# EAGLE board Comunication Board (EAGLE 9.5.0)
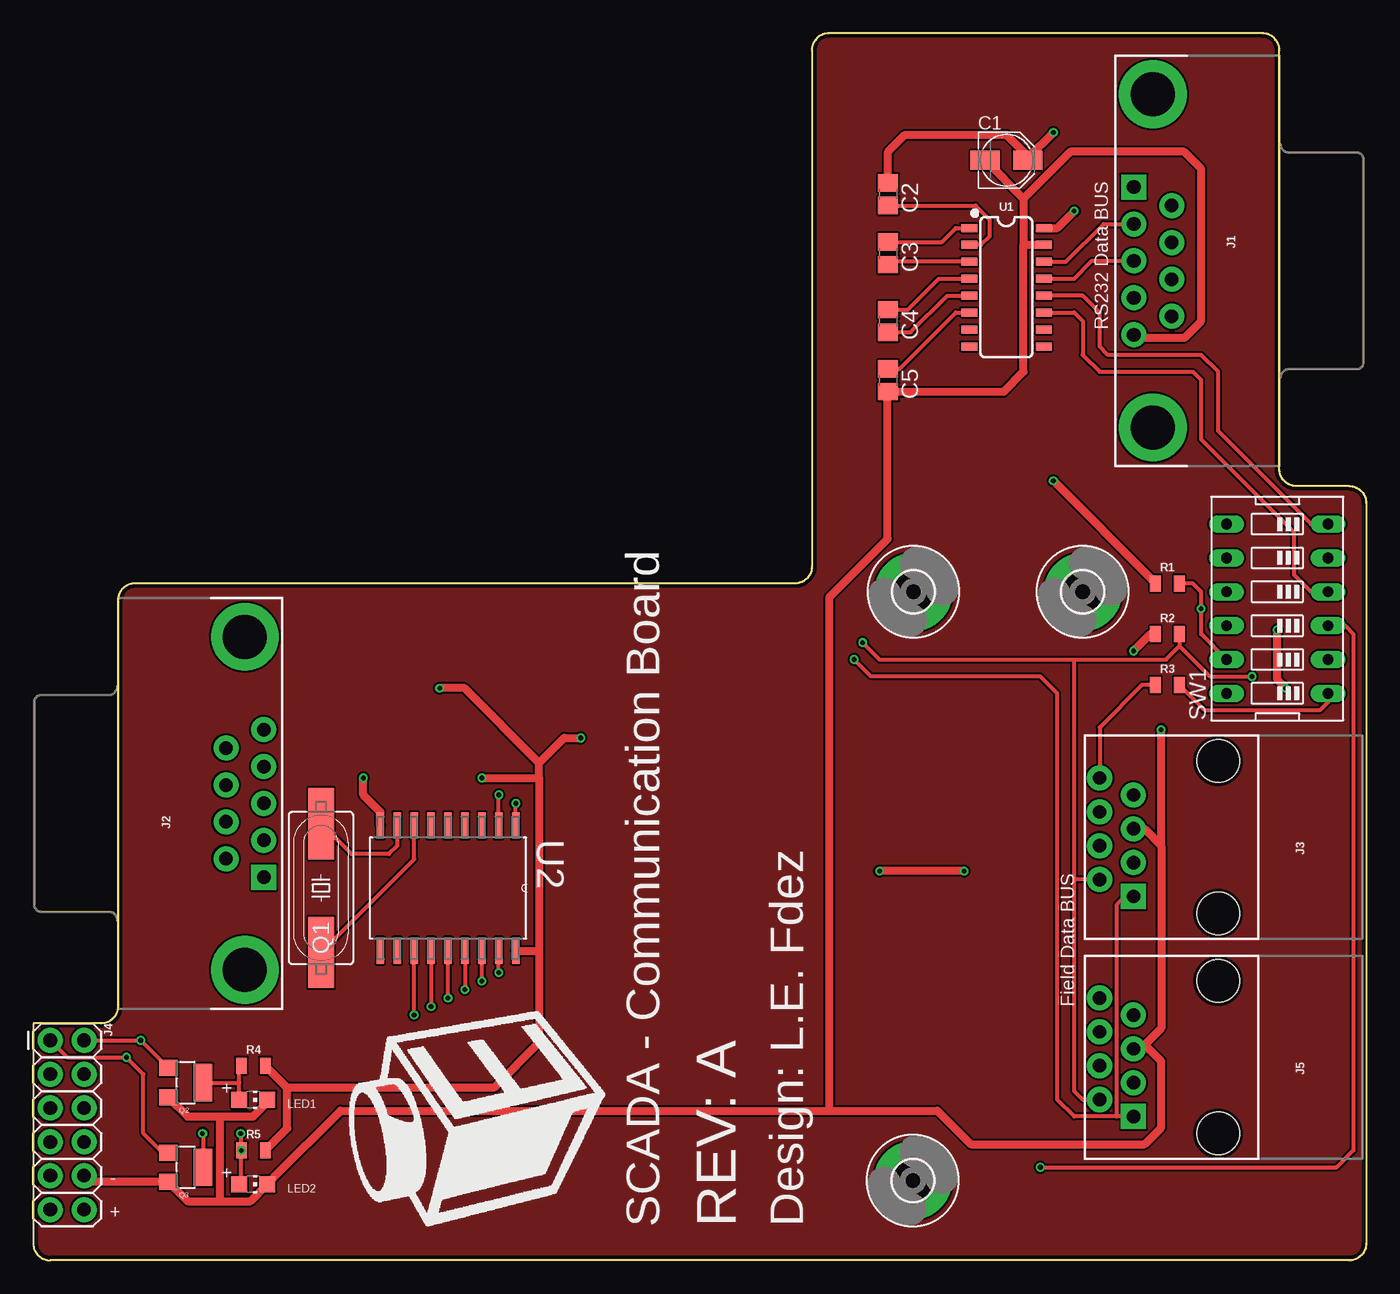
[diagram p0: board, top side]
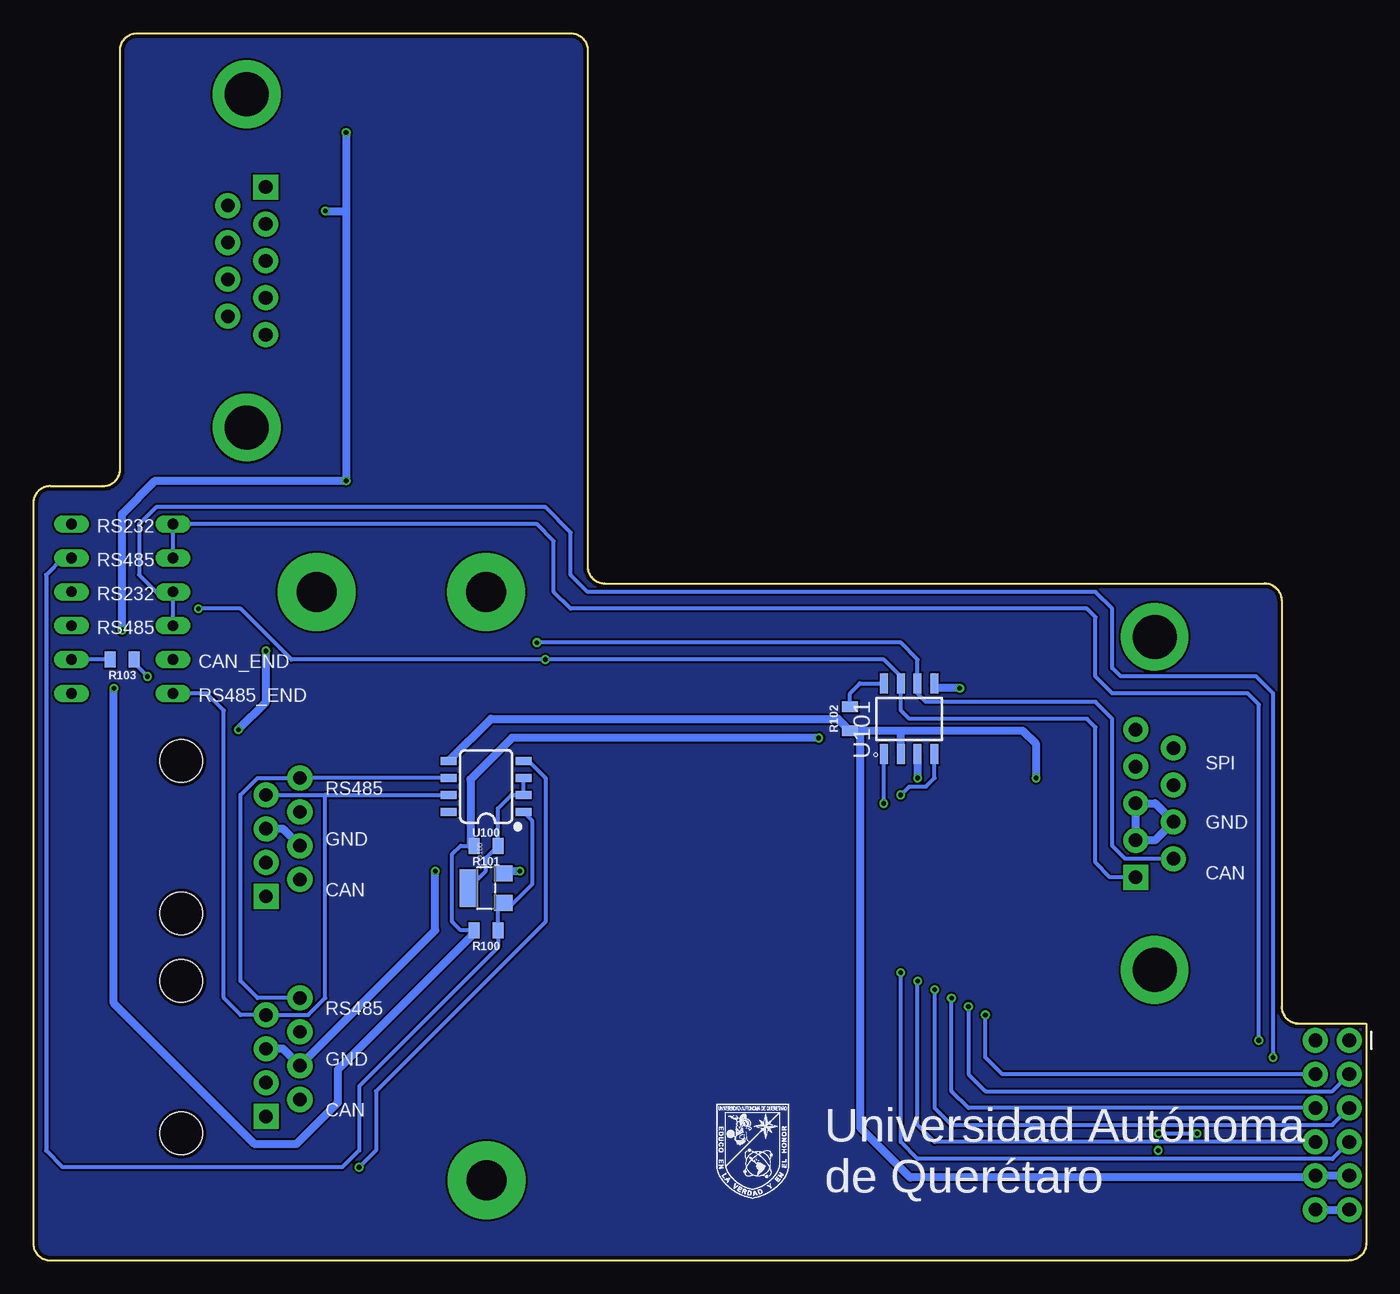
[diagram p1: board, bottom side, seen from below]

Size 100.01 x 92.08 mm. Coordinates in mm from the lower left corner, seen from the top.
Outline: 0,17.78 0,1.27 arc90 1.27,0 98.74,0 arc90 100.01,1.27 100.01,56.83 arc90 98.74,58.1 94.77,58.1 arc-90 93.5,59.37 93.5,90.81 arc90 92.23,92.08 59.69,92.08 arc90 58.42,90.81 58.42,52.07 arc-90 57.15,50.8 7.62,50.8 arc90 6.35,49.53 6.35,19.05 arc-90 5.08,17.78 0,17.78
Copper layers (1*16): Top 0.035mm / dielectric 1.5mm / Bottom 0.035mm
Design rules "SeeedStudio_2layer_DRU_no_angle_20140221": minimum track width 6mil, minimum drill 12mil, track to track 6mil, track to pad 6mil, pad to pad 6mil, via to via 6mil, smd to smd 0mil, copper to edge 10mil, drill to drill 10mil, minimum pad ring 10mil, minimum via ring 6mil, stop-mask expansion 2mil, vias tented up to drill 100mil, thermal gap 10mil

## Footprints (pad centres in the part's own frame; a part is rotated, then mirrored left to right if it is on the bottom)
PANASONIC_B = smd 2.2 x 1.4: + 1.6,0; - -1.6,0
C0805 = smd 1.3 x 1.5: 1 -0.85,0; 2 0.85,0
3,0-PAD = drill 3 pad 5.842: B3,0 0,0
DB9 = drill 1.016 pad 1.88 square: 1 -5.54,-1.42 | drill 1.016 pad 1.88: 2 -2.77,-1.42; 3 0,-1.42; 4 2.77,-1.42; 5 5.54,-1.42; 6 -4.15,1.42; 7 -1.38,1.42; 8 1.38,1.42; 9 4.15,1.42 | drill 3.302 pad 5.08: G1 -12.5,0; G2 12.5,0
RJ45-8 = drill 1 pad 1.88 square: 1 -4.445,6.35 | drill 1 pad 1.88: 2 -3.175,8.89; 3 -1.905,6.35; 4 -0.635,8.89; 5 0.635,6.35; 6 1.905,8.89; 7 3.175,6.35; 8 4.445,8.89 | hole 3.2: -5.715,0; 5.715,0
2X6 = drill 1.016 pad 1.88: 1 0,0; 2 0,2.54; 3 2.54,0; 4 2.54,2.54; 5 5.08,0; 6 5.08,2.54; 7 7.62,0; 8 7.62,2.54; 9 10.16,0; 10 10.16,2.54; 11 12.7,0; 12 12.7,2.54
CHIP-LED0805 = smd 1.2 x 1.2: A 0,-1.05; C 0,1.05
HC49UP = smd 5.334 x 1.93: 1 -4.826,0; 2 4.826,0
SOT23-W = smd 1.2 x 1.4: 1 -1.1,-1.3; 2 1.1,-1.3 | smd 2.8 x 1.4: 3 0,1.3
0805 = smd 0.8 x 1.2: 1 -0.9,0; 2 0.9,0
EDG-06 = drill 0.813 long: 1 -6.35,-3.81; 2 -3.81,-3.81; 3 -1.27,-3.81; 4 1.27,-3.81; 5 3.81,-3.81; 6 6.35,-3.81; 7 6.35,3.81; 8 3.81,3.81; 9 1.27,3.81; 10 -1.27,3.81; 11 -3.81,3.81; 12 -6.35,3.81
SO16 = smd 0.6 x 1.2: 1 -4.445,-2.8; 2 -3.175,-2.8; 3 -1.905,-2.8; 4 -0.635,-2.8; 5 0.635,-2.8; 6 1.905,-2.8; 7 3.175,-2.8; 8 4.445,-2.8; 9 4.445,2.8; 10 3.175,2.8; 11 1.905,2.8; 12 0.635,2.8; 13 -0.635,2.8; 14 -1.905,2.8; 15 -3.175,2.8; 16 -4.445,2.8
SOIC127P1034X264-18N = smd 1.981 x 0.559: 1 -4.699,5.08; 2 -4.699,3.81; 3 -4.699,2.54; 4 -4.699,1.27; 5 -4.699,0; 6 -4.699,-1.27; 7 -4.699,-2.54; 8 -4.699,-3.81; 9 -4.699,-5.08; 10 4.699,-5.08; 11 4.699,-3.81; 12 4.699,-2.54; 13 4.699,-1.27; 14 4.699,0; 15 4.699,1.27; 16 4.699,2.54; 17 4.699,3.81; 18 4.699,5.08
SO08 = smd 0.6 x 1.2: 1 -1.905,-2.8; 2 -0.635,-2.8; 3 0.635,-2.8; 4 1.905,-2.8; 5 1.905,2.8; 6 0.635,2.8; 7 -0.635,2.8; 8 -1.905,2.8
SOIC127P600X175-8N = smd 1.5 x 0.6: 1 -2.65,1.905; 2 -2.65,0.635; 3 -2.65,-0.635; 4 -2.65,-1.905; 5 2.65,-1.905; 6 2.65,-0.635; 7 2.65,0.635; 8 2.65,1.905

## Placement (x,y rotation side)
C1  1uF  [PANASONIC_B]  73.03,82.55 0 top
C2  1uF  [C0805]  64.14,80.01 90 top
C3  1uF  [C0805]  64.14,75.56 270 top
C4  1uF  [C0805]  64.14,70.48 270 top
C5  1uF  [C0805]  64.14,66.04 270 top
H1  MOUNT-PAD-ROUND3.0  [3,0-PAD]  66.04,50.16 0 top
H2  MOUNT-PAD-ROUND3.0  [3,0-PAD]  78.74,50.16 0 top
H3  MOUNT-PAD-ROUND3.0  [3,0-PAD]  66,6 0 top
J1  [DB9]  84,75 270 top
J2  [DB9]  15.88,34.29 90 top
J3  RJ45  [RJ45-8]  88.9,31.75 90 top
J4  2X6 FEMALE  [2X6]  1.27,16.51 270 top
J5  RJ45  [RJ45-8]  88.9,15.24 90 top
LED1  [CHIP-LED0805]  16.51,12.06 270 top
LED2  [CHIP-LED0805]  16.51,5.71 270 top
Q1  16MHz  [HC49UP]  21.59,27.94 90 top
Q2  [SOT23-W]  11.43,13.34 270 top
Q3  [SOT23-W]  11.43,6.99 270 top
Q100  [SOT23-W]  66.04,27.94 90 bottom
R1  1k  [0805]  85.09,50.8 180 top
R2  1k  [0805]  85.09,46.99 0 top
R3  120E  [0805]  85.09,43.18 0 top
R4  1k  [0805]  16.51,14.61 0 top
R5  1k  [0805]  16.51,8.26 0 top
R100  10k  [0805]  66.04,24.77 180 bottom
R101  10k  [0805]  66.04,31.11 180 bottom
R102  100k  [0805]  38.73,40.64 90 bottom
R103  270E  [0805]  93.34,45.09 180 bottom
SW1  [EDG-06]  93.34,48.9 90 top
U1  MAX3232  [SO16]  73.03,73.03 270 top
U2  MCP2515-I/SO  [SOIC127P1034X264-18N]  31.11,27.94 270 top
U100  MAX3485CSA  [SO08]  66.04,35.56 90 bottom
U101  MCP2562T-H/SN  [SOIC127P600X175-8N]  34.29,40.64 90 bottom

## Library data of the parts
C1-C5 LED1 LED2 Q2 Q3 Q100 = adafruit
H1-H3 = holes
J1 J2 = SparkFun-Connectors; PROD_ID: CONN-08194
J3 J5 = SparkFun-Connectors; PROD_ID: CONN-08506; SF_ID: PRT-00643
J4 = SparkFun-Connectors; PROD_ID: CONN-12423
Q1 = adafruit; OC_FARNELL: unknown; OC_NEWARK: unknown
R1-R5 R100-R103 = SparkFun-Resistors
SW1 = special
U1 = SparkFun-IC-Comms; PROD_ID: IC-08171
U2 = MCP2515-I_SO; AVAILABILITY: Unavailable; DESCRIPTION: MCP2515 Series 5.5 V 1 Mb/s Stand Alone SPI Interface CAN Controller- SOIC-18; MF: Microchip; MP: MCP2515-I/SO; PACKAGE: SOIC-18 Microchip; PRICE: None
U100 = SparkFun-IC-Comms; PROD_ID: IC-09388
U101 = MCP2562T-H_SN; AVAILABILITY: Unavailable; DESCRIPTION: CAN 1Mbps Standby 5.5V 8-Pin SOIC T/R; MF: Microchip; MP: MCP2562T-H/SN; PACKAGE: SO-8 Microchip; PRICE: None

## Nets
3.3V: C1.+ C2.2 R1.2 R4.2 R5.2 R100.2 R101.2 U1.16 U2.18 U101.3 U101.5
5V: U100.8
232_RX: SW1.4 U1.11
232_TX: SW1.6 U1.12
485_RX: SW1.3 U100.4
485_TX: Q100.1 R100.1 SW1.5 U100.1
A: J3.8 J5.8 R3.1 U100.6
AGND: J2.2 J2.3 J2.7
B: J3.7 J5.7 SW1.12 U100.7
CAN_CS: J4.8 U2.16
CAN_H: J2.1 J3.1 J5.1 R1.1 SW1.11 U101.7
CAN_INT: J4.4 U2.12
CAN_L: J2.6 J3.2 J5.2 R2.2 R103.1 U101.6
CAN_MISO: J4.5 U2.15
CAN_MOSI: J4.6 U2.14
CAN_RESET: J4.7 U2.17
CAN_SCK: J4.3 U2.13
CS: J2.5
GND: C1.- C5.2 J1.5 J3.4 J3.5 J4.9 J4.10 J5.4 J5.5 LED1.C LED2.C Q2.2 Q3.2 Q100.2 R2.1 R102.1 U1.15 U2.9 U100.5 U101.2
MISO: J2.9
MOSI: J2.8
N$1: C3.2 U1.3
N$2: C2.1 U1.2
N$3: C3.1 U1.1
N$4: C4.1 U1.4
N$5: C4.2 U1.5
N$6: C5.1 U1.6
N$7: R103.2 SW1.2
N$8: LED2.A Q3.3 R5.1
N$9: J1.2 U1.14
N$10: J1.3 U1.13
N$12: LED1.A Q2.3 R4.1
N$15: U2.1 U101.1
N$16: U2.2 U101.4
N$17: Q1.2 U2.8
N$18: R3.2 SW1.1
N$19: Q1.1 U2.7
N$28: Q100.3 R101.1 U100.2 U100.3
N$41: R102.2 U101.8
RX: J4.1 Q3.1 SW1.9 SW1.10
SCK: J2.4
TX: J4.2 Q2.1 SW1.7 SW1.8
VCC: J4.11 J4.12

## Tracks (layer width: path | path; a pad name or v marks a point on that pad's centre or on a via)
3.3V  (via drill 0.35)
  Top 0.61: R5.2 19.05,9.89 19.05,12.96 | 19.05,12.96 R4.2 | C2.2 64.14,83.19 65.41,84.45 73.03,84.45 74.62,82.86 C1.+ 74.68,82.77 v76.54,84.63 | 19.05,12.96 34.55,12.96 37.96,16.37 37.96,23.18 | v76.54,58.5 84.01,51.03 R1.2 | v30.49,42.94 32.36,42.94 37.96,37.34 | 37.96,36.2 37.96,37.34 | v41.07,39.2 39.83,39.2 37.96,37.34 | v93.34,47.3 93.34,43.56 v93.97,42.94 | U1.16 76.83,77.47 v78.11,78.74 | v33.66,36.2 37.96,36.2 | 37.96,36.2 37.96,23.18 | U2.18 37.9,23.24 37.96,23.18
  Bottom 0.305: R100.2 67.94,24.77 68.58,25.4 68.58,30.48 67.94,31.11 67.21,31.11
  Bottom 0.61: v76.54,84.63 76.54,78.74 | 76.54,78.74 v76.54,58.5 90.86,58.5 93.34,56.01 v93.34,47.3 | v30.49,42.94 32.36,42.94 U101.5 | v41.07,39.2 64.1,39.2 67.21,36.09 67.21,31.11 R101.2 | v93.97,42.94 93.97,19.29 83.39,8.71 80.28,8.71 77.17,11.82 77.17,14.31 67.21,24.27 R100.2 | v78.11,78.74 76.54,78.74 | U101.3 v33.66,36.2
232_RX
  Top 0.305: SW1.4 95.89,50.16 94.61,51.44 94.61,54.61 87.63,61.59 87.63,66.04 87,66.67 80.01,66.67 78.74,67.94 78.74,70.48 78.11,71.12 U1.11
232_TX
  Top 0.305: SW1.6 95.89,55.24 88.9,62.23 88.9,66.67 87.63,67.94 80.64,67.94 80.01,68.58 80.01,71.12 78.74,72.39 U1.12
485_RX  (via drill 0.35)
  Top 0.305: SW1.3 98.42,47.62 99.06,46.99 99.06,8.26 97.79,6.99 v75.56,6.99
  Bottom 0.305: U100.4 62.87,37.47 61.59,36.2 61.59,25.4 74.3,12.7 74.3,8.26 v75.56,6.99
485_TX
  Bottom 0.305: U100.1 62.6,33.02 62.6,28.2 64.14,26.67 64.57,26.67 Q100.1 65.14,26.44 R100.1 65.14,23.5 75.56,13.07 75.56,8.26 76.83,6.99 97.79,6.99 99.06,8.26 99.06,51.44 97.79,52.7 SW1.5
A
  Top 0.305: R3.1 83.19,43.18 80.01,40.01 J3.8
  Bottom 0.305: U100.6 J3.8 83.19,36.2 84.45,34.92 84.45,20.95 83.19,19.68 J5.8
AGND
  Bottom 0.61: J2.3 15.84,34.29 J2.7 15.85,31.52 J2.2 J2.3
B
  Bottom 0.305: J3.7 78.11,34.92 | 78.11,34.92 U100.7 | 78.11,34.92 78.11,19.68 79.38,18.41 J5.7 84.45,18.41 85.72,19.68 85.72,41.27 87,42.55 SW1.12
CAN_CS  (via drill 0.35)
  Top 0.305: v33.66,20.95 U2.16
  Bottom 0.305: J4.8 32.38,8.89 33.66,10.16 v33.66,20.95
CAN_H  (via drill 0.35)
  Top 0.305: J3.1 81.92,27.3 81.28,26.67 81.28,10.79 | SW1.11 87.63,46.99 v87.63,48.9 87.63,50.16 87,50.8 R1.1 | 81.28,10.79 78.11,10.79 76.83,12.06 76.83,42.55 75.56,43.81 62.87,43.81 v61.59,45.09 | J5.1 81.28,10.79
  Bottom 0.305: J2.1 19.23,28.75 20.32,29.84 20.32,40.01 20.95,40.64 34.29,40.64 34.92,41.27 U101.7 34.92,43.81 36.2,45.09 v61.59,45.09 80.64,45.09 84.45,48.9 v87.63,48.9
CAN_INT  (via drill 0.35)
  Top 0.305: v28.57,18.41 U2.12
  Bottom 0.305: J4.4 27.3,13.97 28.57,15.24 v28.57,18.41
CAN_L  (via drill 0.35)
  Top 0.305: J5.2 78.74,12.06 78.11,12.7 78.11,28.57 | R2.2 85.99,46.09 | 85.99,46.09 88.27,43.81 v91.44,43.81 | v62.23,46.35 63.5,45.09 78.11,45.09 | 85.99,46.09 84.98,45.09 78.11,45.09 | 78.11,28.57 78.11,45.09 | J3.2 78.11,28.57
  Bottom 0.305: v91.44,43.81 92.44,44.82 R103.1 | J2.6 18.07,30.14 19.05,31.11 19.05,40.64 20.32,41.91 33.02,41.91 33.66,42.55 U101.6 33.66,45.09 34.92,46.35 v62.23,46.35
CAN_MISO  (via drill 0.35)
  Top 0.305: U2.15 v32.38,20.32
  Bottom 0.305: v32.38,20.32 32.38,11.43 31.11,10.16 2.54,10.16 J4.5
CAN_MOSI  (via drill 0.35)
  Top 0.305: v31.11,19.68 U2.14
  Bottom 0.305: J4.6 29.84,11.43 31.11,12.7 v31.11,19.68
CAN_RESET  (via drill 0.35)
  Top 0.305: v34.92,21.59 U2.17
  Bottom 0.305: J4.7 2.54,7.62 33.66,7.62 34.92,8.89 v34.92,21.59
CAN_SCK  (via drill 0.35)
  Top 0.305: U2.13 v29.84,19.05
  Bottom 0.305: v29.84,19.05 29.84,13.97 28.57,12.7 2.54,12.7 J4.3
COPPER
  pour Bottom: 95.57,58.1 98.74,58.1 arc-90 100.01,56.83 100.01,1.27 arc-90 98.74,0 95.25,0 1.27,0 arc-90 0,1.27 0,17.78 5.08,17.78 arc90 6.35,19.05 6.35,49.53 arc-90 7.62,50.8 57.15,50.8 arc90 58.42,52.07 58.42,54.61 58.42,90.49 58.42,90.81 arc-90 59.69,92.08 61.28,92.08 92.23,92.08 arc-90 93.5,90.81 93.5,59.37 arc90 94.77,58.1
  pour Top: 65.41,92.08 92.23,92.08 arc-90 93.5,90.81 93.5,59.37 arc90 94.77,58.1 98.74,58.1 arc-90 100.01,56.83 100.01,1.27 arc-90 98.74,0 1.27,0 arc-90 0,1.27 0,17.78 5.08,17.78 arc90 6.35,19.05 6.35,49.53 arc-90 7.62,50.8 57.15,50.8 arc90 58.42,52.07 58.42,53.98 58.42,90.81 arc-90 59.69,92.08
GND  (via drill 0.35)
  Top 0.61: Q2.2 11.57,10.79 13.97,10.79 | 13.97,10.79 16.51,10.79 17.56,11.85 LED1.C | 13.97,4.45 11.57,4.45 Q3.2 4.28,5.88 J4.10 | 13.97,4.45 16.29,4.45 LED2.C 18.05,6.22 23.05,11.23 59.74,11.23 | C1.- 74.3,79.68 | 74.3,79.68 74.3,76.2 | 74.3,76.2 U1.15 | 74.3,76.2 74.3,66.67 72.81,65.19 C5.2 64.1,64.72 64.1,54.14 59.74,49.78 59.74,11.23 | J1.5 82.83,69.22 86.36,69.22 87.63,70.48 87.63,81.92 86.36,83.19 77.8,83.19 74.3,79.68 | 83.39,16.18 82.77,16.18 J5.5 83.39,16.18 | 83.39,16.18 84.63,17.42 84.63,31.11 | 84.63,31.11 83.39,32.36 82.77,32.36 J3.5 | 83.39,16.18 84.63,14.94 84.63,9.96 83.39,8.71 70.34,8.71 67.83,11.23 59.74,11.23 | U2.9 26.04,33.66 24.77,34.92 v24.77,36.2 | 13.97,10.79 13.97,4.45 | 84.63,31.11 v84.63,39.83 | v82.55,45.72 83.82,46.99 R2.1 | v69.85,29.21 v63.5,29.21
  Bottom 0.61: J4.9 J4.10 4.36,6.22 34.23,6.22 37.96,9.96 37.96,39.74 | J5.5 81.28,15.88 J5.4 69.85,24.77 v69.85,29.21 | J3.4 81.28,32.38 J3.5 | 37.96,39.74 R102.1 39.63,40.64 65.67,40.64 U100.5 | v24.77,36.2 24.77,38.73 25.77,39.74 34.92,39.74 | 34.92,39.74 37.96,39.74 | U101.2 34.92,39.74 | v84.63,39.83 82.55,41.91 v82.55,45.72 | Q100.2 64.57,29.21 v63.5,29.21
N$1
  Top 0.305: U1.3 64.35,74.93 C3.2
N$2
  Top 0.305: C2.1 70.7,79.16 71.75,78.11 71.75,76.83 71.12,76.2 U1.2
N$3
  Top 0.305: C3.1 68.16,76.42 69.22,77.47 U1.1
N$4
  Top 0.305: C4.1 65.62,71.33 67.94,73.66 U1.4
N$5
  Top 0.305: C4.2 65.83,69.64 68.58,72.39 U1.5
N$6
  Top 0.305: C5.1 64.98,66.89 69.22,71.12 U1.6
N$7
  Bottom 0.305: R103.2 SW1.2
N$8  (via drill 0.35)
  Top 0.305: R5.1 v15.61,8.25 15.61,7.94 | LED2.A 15.61,5.87 15.61,7.94 | v12.7,9.53 12.73,9.49 Q3.3 | v15.56,9.53 15.56,7.99 15.61,7.94
  Bottom 0.305: v15.56,9.53 v12.7,9.53
N$9
  Top 0.305: U1.14 77.47,74.93 80.31,77.77 J1.2
N$10
  Top 0.305: U1.13 78.11,73.66 79.44,75 J1.3
N$12
  Top 0.305: LED1.A 15.46,13.34 | 15.46,13.34 15.46,14.46 R4.1 | Q2.3 15.46,13.34
N$15  (via drill 0.35)
  Top 0.305: U2.1 v36.2,34.29
  Bottom 0.305: v36.2,34.29 U101.1
N$16  (via drill 0.35)
  Top 0.305: U2.2 v34.92,34.92
  Bottom 0.305: v34.92,34.92 34.29,35.56 33.02,35.56 32.38,36.2 U101.4
N$17
  Top 0.305: U2.8 27.3,31.11 26.67,30.48 23.88,30.48 Q1.2
N$18
  Top 0.305: R3.2 87.89,41.27 96.52,41.27 97.16,41.91 SW1.1
N$19
  Top 0.305: Q1.1 28.57,30.1 U2.7
N$28
  Bottom 0.305: Q100.3 66.04,29.24 66.04,30.21 R101.1 65.14,33.92 64.14,34.92 U100.2 U100.3
N$41
  Bottom 0.305: R102.2 38.73,42.55 37.99,43.29 U101.8
RX  (via drill 0.35)
  Top 0.305: J4.1 2.54,15.24 v6.99,15.24 8.26,13.97 8.26,9.53 9.7,8.09 Q3.1
  Bottom 0.305: SW1.10 SW1.9 90.81,50.16 92.08,51.44 92.08,55.24 90.81,56.52 61.59,56.52 59.69,54.61 59.69,51.44 58.42,50.16 20.32,50.16 19.05,48.9 19.05,44.45 18.41,43.81 8.26,43.81 6.99,42.55 v6.99,15.24
TX  (via drill 0.35)
  Top 0.305: Q2.1 v8.05,16.51 J4.2
  Bottom 0.305: SW1.8 SW1.7 62.23,55.24 60.96,53.98 60.96,50.16 59.69,48.9 20.95,48.9 20.32,48.26 20.32,43.81 19.05,42.55 8.89,42.55 8.05,41.71 v8.05,16.51
VCC
  Bottom 0.61: J4.12 J4.11

## Text on the board
tPlace: RS232 Data BUS | Field Data BUS | - | + | SCADA - Communication Board | REV: A | Design: L.E. Fdez
bPlace: RS232 | RS485 | RS232 | RS485 | CAN_END | RS485_END | SPI | RS485 | GND | GND | CAN | CAN | RS485 | GND | CAN | Universidad Autónoma / de Querétaro